# EAGLE board dashboard-pcb@aveon (EAGLE 9.6.2)
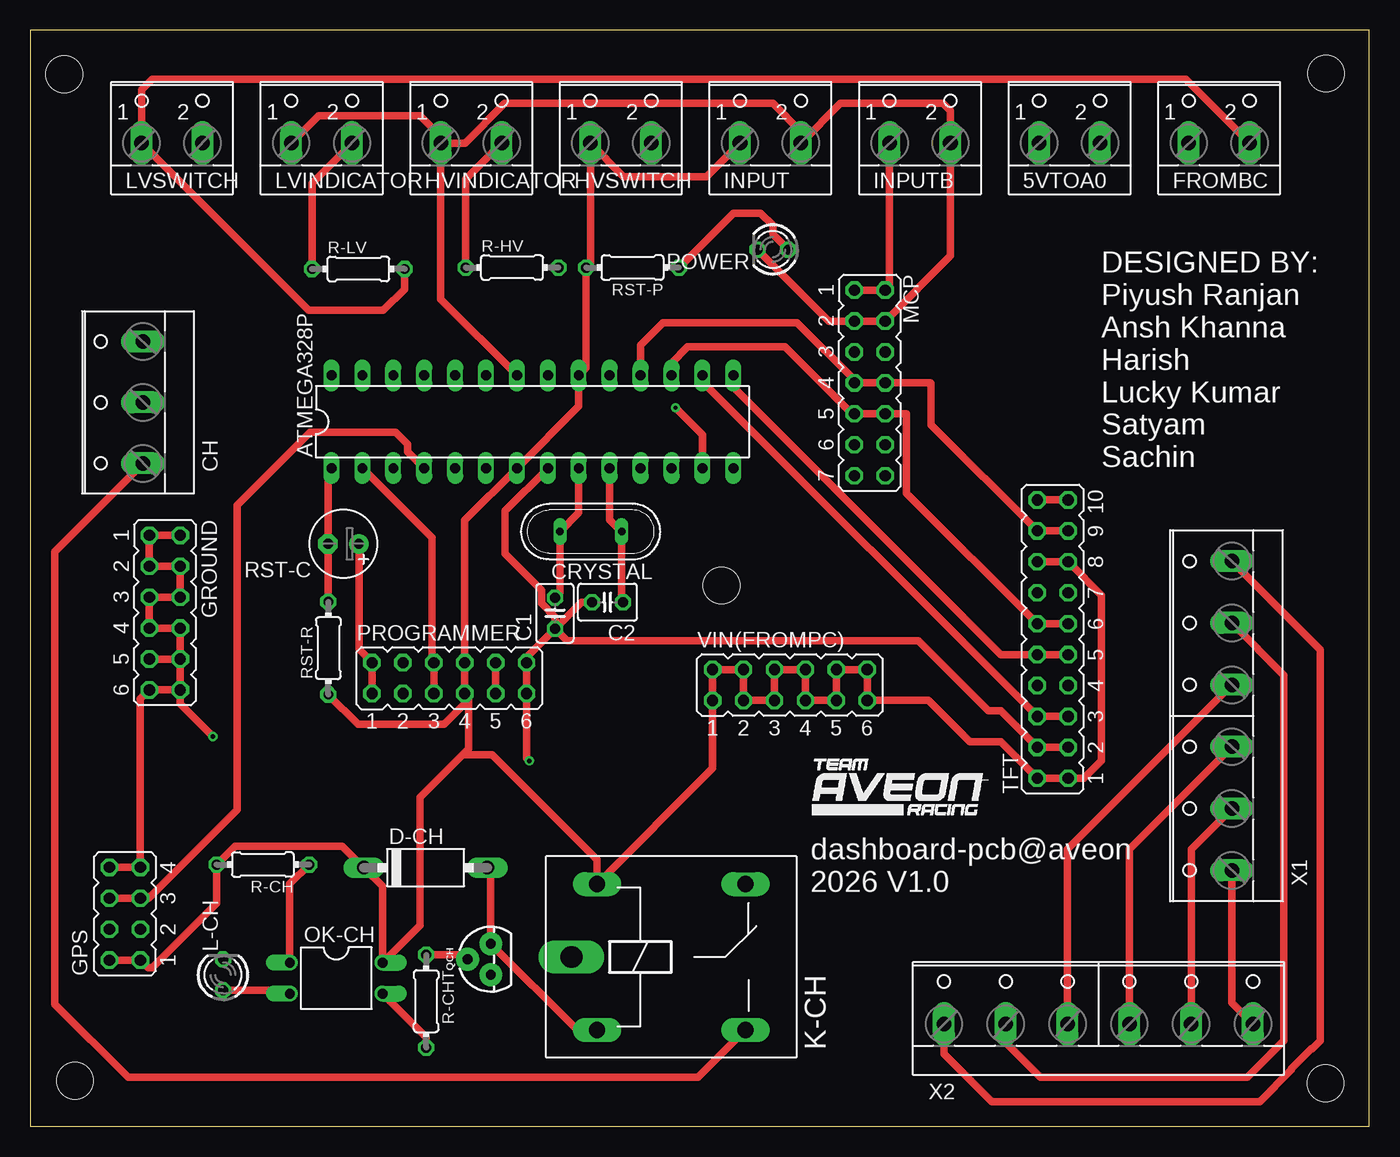
[diagram p0: board, top side]
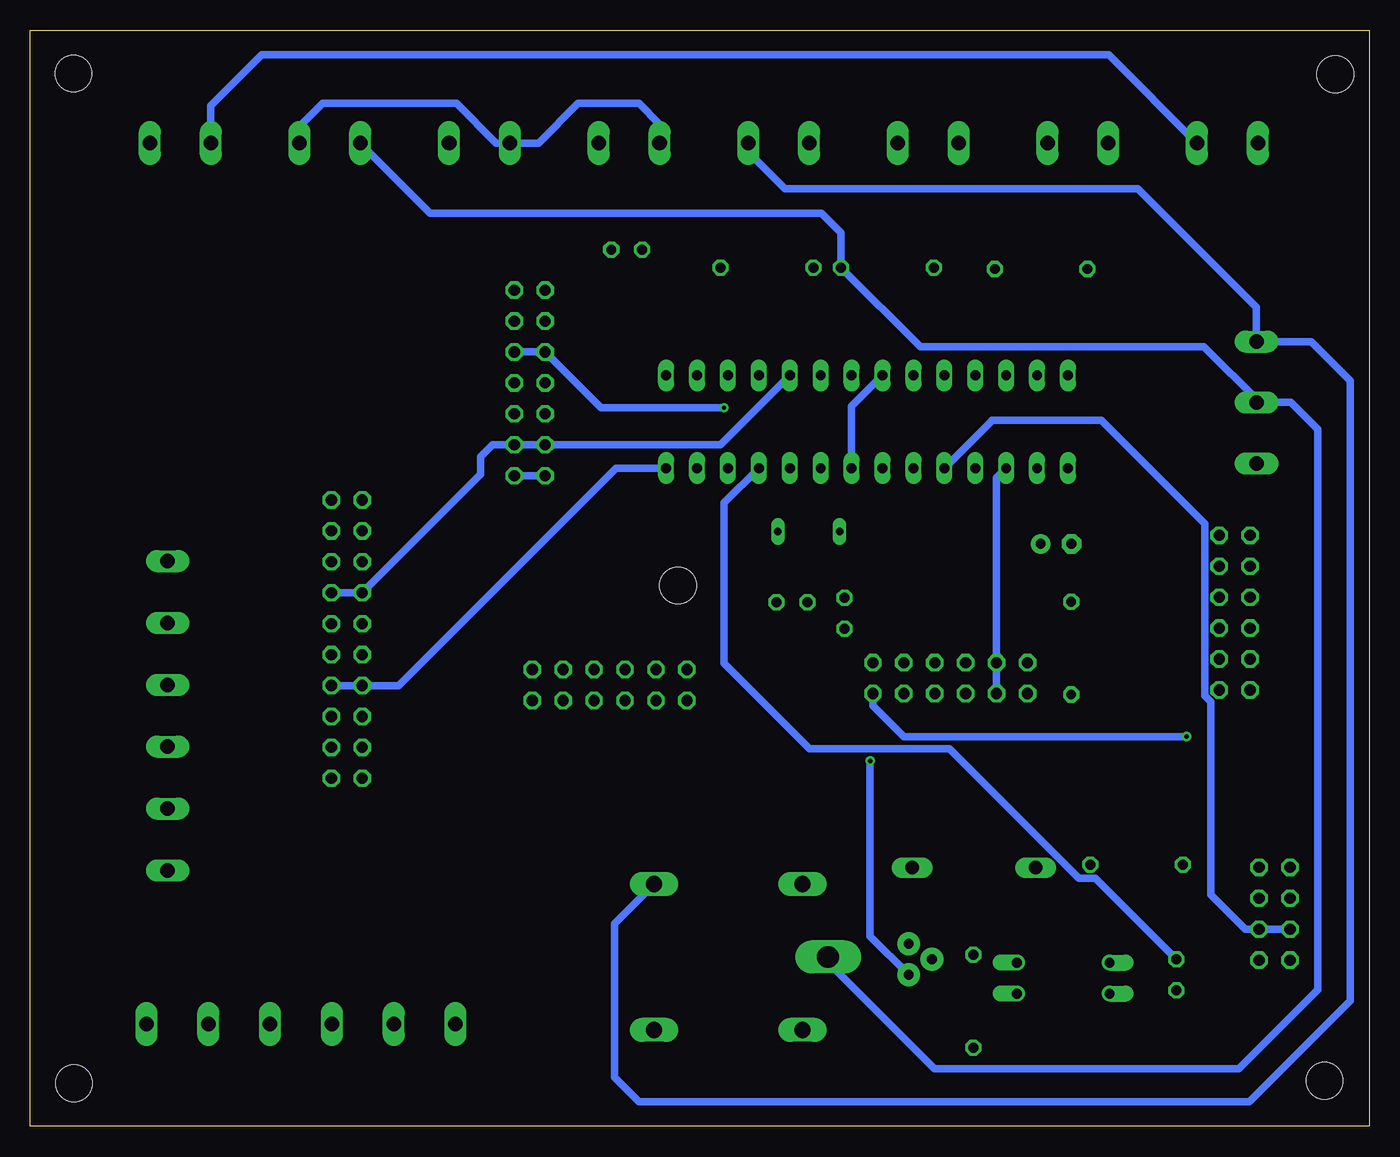
[diagram p1: board, bottom side, seen from below]

Size 110 x 90 mm. Coordinates in mm from the lower left corner, seen from the top.
Outline: 0,0 110,0 110,90 0,90 0,0
Copper layers (1*16): Top 0.035mm / dielectric 1.5mm / Bottom 0.035mm
Design rules "default": minimum track width 6mil, minimum drill 0.35mm, track to track 6mil, track to pad 6mil, pad to pad 6mil, via to via 6mil, smd to smd 6mil, copper to edge 40mil, drill to drill 6mil, minimum pad ring 10mil, minimum via ring 8mil, stop-mask expansion 4mil, vias tented up to drill 0mil, thermal gap 10mil
Holes 3 mm at 2.78,86.41 106.47,86.45 106.43,3.53 3.67,3.73 56.78,44.41

## Footprints (pad centres in the part's own frame; a part is rotated, then mirrored left to right if it is on the bottom)
W237-102 = drill 1.194 long: 1 -2.5,-1.27; 2 2.5,-1.27
DIL28-3 = drill 0.813 long: 1 -16.51,-3.81; 2 -13.97,-3.81; 3 -11.43,-3.81; 4 -8.89,-3.81; 5 -6.35,-3.81; 6 -3.81,-3.81; 7 -1.27,-3.81; 8 1.27,-3.81; 9 3.81,-3.81; 10 6.35,-3.81; 11 8.89,-3.81; 12 11.43,-3.81; 13 13.97,-3.81; 14 16.51,-3.81; 15 16.51,3.81; 16 13.97,3.81; 17 11.43,3.81; 18 8.89,3.81; 19 6.35,3.81; 20 3.81,3.81; 21 1.27,3.81; 22 -1.27,3.81; 23 -3.81,3.81; 24 -6.35,3.81; 25 -8.89,3.81; 26 -11.43,3.81; 27 -13.97,3.81; 28 -16.51,3.81
C025-030X050 = drill 0.813 octagon: 1 -1.27,0; 2 1.27,0
W237-103 = drill 1.194 long: 1 -5,-1.29; 2 0,-1.29; 3 5,-1.29
QS = drill 0.61 long: 1 -2.54,0; 2 2.54,0
P1-10 = drill 1.118 long: A 5.08,0; C -5.08,0
JP4Q = drill 0.914 octagon: 1 -3.81,-1.27; 2 -3.81,1.27; 3 -1.27,-1.27; 4 -1.27,1.27; 5 1.27,-1.27; 6 1.27,1.27; 7 3.81,-1.27; 8 3.81,1.27
JP6Q = drill 0.914 octagon: 1 -6.35,-1.27; 2 -6.35,1.27; 3 -3.81,-1.27; 4 -3.81,1.27; 5 -1.27,-1.27; 6 -1.27,1.27; 7 1.27,-1.27; 8 1.27,1.27; 9 3.81,-1.27; 10 3.81,1.27; 11 6.35,-1.27; 12 6.35,1.27
ZF112 = drill 1.321 long: 1 -6.096,5.994; 2 -6.096,-5.994; O 6.096,5.994; S 6.096,-5.994 | drill 1.803 long: P -8.204,0
LED3MM = drill 0.813 octagon: A -1.27,0; K 1.27,0
JP7Q = drill 0.914 octagon: 1 -7.62,-1.27; 2 -7.62,1.27; 3 -5.08,-1.27; 4 -5.08,1.27; 5 -2.54,-1.27; 6 -2.54,1.27; 7 0,-1.27; 8 0,1.27; 9 2.54,-1.27; 10 2.54,1.27; 11 5.08,-1.27; 12 5.08,1.27; 13 7.62,-1.27; 14 7.62,1.27
DIL04 = drill 0.813 offset: 1 -1.27,-3.81; 2 1.27,-3.81; 3 1.27,3.81; 4 -1.27,3.81
TO-92 = drill 0.813 pad 1.88: 1 -1.27,0; 2 0,1.905; 3 1.27,0
0204/7 = drill 0.813 octagon: 1 -3.81,0; 2 3.81,0
E2,5-6 = drill 0.813 pad 1.6: + -1.27,0 | drill 0.813 pad 1.6 octagon: - 1.27,0
JP10Q = drill 0.914 octagon: 1 -11.43,-1.27; 2 -11.43,1.27; 3 -8.89,-1.27; 4 -8.89,1.27; 5 -6.35,-1.27; 6 -6.35,1.27; 7 -3.81,-1.27; 8 -3.81,1.27; 9 -1.27,-1.27; 10 -1.27,1.27; 11 1.27,-1.27; 12 1.27,1.27; 13 3.81,-1.27; 14 3.81,1.27; 15 6.35,-1.27; 16 6.35,1.27; 17 8.89,-1.27; 18 8.89,1.27; 19 11.43,-1.27; 20 11.43,1.27
W237-6P = drill 1.194 long: 1 -12.7,-0.635; 2 -7.62,-0.635; 3 -2.54,-0.635; 4 2.54,-0.635; 5 7.62,-0.635; 6 12.7,-0.635

## Placement (x,y rotation side)
5VTOA0  [W237-102]  85.39,82.01 0 top
ATMEGA328P  [DIL28-3]  41.25,57.86 0 top
C1  [C025-030X050]  43.1,42.13 90 top
C2  [C025-030X050]  47.42,43.03 180 top
CH  CHARGING  [W237-103]  7.97,59.44 90 top
CRYSTAL  [QS]  46.05,48.83 180 top
D-CH  BA157  [P1-10]  32.47,21.23 0 top
FROMBC  [W237-102]  97.68,82.01 0 top
GPS  [JP4Q]  7.77,17.44 90 top
GROUND  [JP6Q]  11.05,42.17 270 top
HVINDICATOR  [W237-102]  36.22,82.01 0 top
HVSWITCH  [W237-102]  48.51,82.01 0 top
INPUT  [W237-102]  60.81,82.01 0 top
INPUTB  [W237-102]  73.1,82.01 0 top
K-CH  5V  [ZF112]  52.66,13.89 0 top
L-CH  Hijau  [LED3MM]  15.83,12.42 90 top
LVINDICATOR  [W237-102]  23.93,82.01 0 top
LVSWITCH  [W237-102]  11.63,82.01 0 top
MCP  [JP7Q]  68.97,61.05 270 top
OK-CH  PC817  [DIL04]  25.13,12.15 270 top
POWER  Hijau  [LED3MM]  61,72 180 top
PROGRAMMER  [JP6Q]  34.42,36.8 0 top
QCH  200mA/40V  [TO-92]  37.83,13.71 90 top
R-CH  [0204/7]  19.1,21.48 180 top
R-CHT  [0204/7]  32.52,10.26 270 top
R-HV  [0204/7]  39.58,70.52 0 top
R-LV  [0204/7]  26.95,70.4 0 top
RST-C  [E2,5-6]  25.72,47.83 180 top
RST-P  [0204/7]  49.48,70.52 180 top
RST-R  [0204/7]  24.48,39.26 90 top
TFT  [JP10Q]  84,40 90 top
VIN(FROMPC)  [JP6Q]  62.41,36.23 0 top
X1  [W237-6P]  98.09,33.71 90 top
X2  [W237-6P]  87.77,9.03 0 top

## Library data of the parts
5VTOA0 FROMBC HVINDICATOR HVSWITCH INPUT INPUTB LVINDICATOR LVSWITCH = con-wago-500; MPN: 237-102; OC_FARNELL: unknown; OC_NEWARK: 70K9898
ATMEGA328P = ic-package
C1 C2 RST-C = rcl; SPICEPREFIX: C
CH = con-wago-500; MPN: 237-103; OC_FARNELL: unknown; OC_NEWARK: 18M7116
CRYSTAL = special
D-CH = diode
GPS GROUND MCP PROGRAMMER TFT VIN(FROMPC) = jumper
K-CH = relay; OC_FARNELL: unknown; OC_NEWARK: unknown
L-CH POWER = led
OK-CH = optocoupler; MPN: PC817X4J000F; OC_FARNELL: 9707727; OC_NEWARK: 97K7059
QCH = SparkFun-DiscreteSemi; PROD_ID: TRANS-08447
R-CH R-CHT R-HV R-LV RST-P RST-R = rcl; SPICEPREFIX: R
X1 X2 = con-wago-508; OC_FARNELL: unknown; OC_NEWARK: unknown

## Nets
BACKUP-1: ATMEGA328P.12
BACKUP-2: ATMEGA328P.6
CH: ATMEGA328P.11 L-CH.K
CS7-CAN: ATMEGA328P.13 MCP.5 MCP.6
CS10-TFT: ATMEGA328P.16 TFT.5 TFT.6
DC9-TFT: ATMEGA328P.15 TFT.9 TFT.10
GND: ATMEGA328P.8 ATMEGA328P.22 C1.1 C2.2 GPS.7 GPS.8 GROUND.1 GROUND.2 GROUND.3 GROUND.4 GROUND.5 GROUND.6 GROUND.7 GROUND.8 GROUND.9 GROUND.10 GROUND.11 GROUND.12 HVINDICATOR.1 INPUT.2 INPUTB.2 LVINDICATOR.1 MCP.3 MCP.4 POWER.K PROGRAMMER.11 PROGRAMMER.12 QCH.1 TFT.3 TFT.4
INT: MCP.13 MCP.14
MISO: ATMEGA328P.18 MCP.7 MCP.8 TFT.17 TFT.18
MOSI: ATMEGA328P.17 MCP.9 MCP.10 TFT.11 TFT.12
N$1: POWER.A RST-P.1
N$5: FROMBC.1 LVSWITCH.2
N$6: FROMBC.2 LVSWITCH.1 R-LV.2
N$7: LVINDICATOR.2 R-LV.1
N$9: PROGRAMMER.1 PROGRAMMER.2 RST-C.+
N$13: ATMEGA328P.9 C1.2 CRYSTAL.2
N$14: X1.1 X2.6
N$16: ATMEGA328P.26
N$17: ATMEGA328P.25
N$18: X1.2 X2.5
N$19: X1.3 X2.4
N$20: ATMEGA328P.24
N$21: X1.4 X2.3
N$22: L-CH.A OK-CH.2
N$23: CH.3 HVSWITCH.2 K-CH.O
N$24: OK-CH.1 R-CH.1
N$25: OK-CH.3 R-CHT.2
N$26: D-CH.A K-CH.2 QCH.3
N$27: ATMEGA328P.23
N$28: QCH.2 R-CHT.1
N$29: CH.1 K-CH.S
N$30: 5VTOA0.1 CH.2 K-CH.P R-HV.2
N$31: X1.5 X2.2
N$32: HVINDICATOR.2 R-HV.1
N$33: X1.6 X2.1
N$42: TFT.19 TFT.20
N$62: ATMEGA328P.10 C2.1 CRYSTAL.1
N$66: PROGRAMMER.9 PROGRAMMER.10
N$87: ATMEGA328P.28
N$88: ATMEGA328P.27
RST: ATMEGA328P.1 RST-C.- RST-R.2
RST8-TFT: ATMEGA328P.14 TFT.7 TFT.8
RX: ATMEGA328P.2 PROGRAMMER.5 PROGRAMMER.6
RX3-GPS: ATMEGA328P.5 GPS.3 GPS.4
SCK: ATMEGA328P.19 MCP.11 MCP.12 TFT.13 TFT.14
TX: ATMEGA328P.3 PROGRAMMER.3 PROGRAMMER.4
TX2-GPS: ATMEGA328P.4 GPS.5 GPS.6
VIN(FROMPCB): 5VTOA0.2 ATMEGA328P.7 ATMEGA328P.20 D-CH.C GPS.1 GPS.2 HVSWITCH.1 INPUT.1 INPUTB.1 K-CH.1 MCP.1 MCP.2 OK-CH.4 PROGRAMMER.7 PROGRAMMER.8 R-CH.2 RST-P.2 RST-R.1 TFT.1 TFT.2 TFT.15 TFT.16 VIN(FROMPC).1 VIN(FROMPC).2 VIN(FROMPC).3 VIN(FROMPC).4 VIN(FROMPC).5 VIN(FROMPC).6 VIN(FROMPC).7 VIN(FROMPC).8 VIN(FROMPC).9 VIN(FROMPC).10 VIN(FROMPC).11 VIN(FROMPC).12

## Tracks (layer width: path | path; a pad name or v marks a point on that pad's centre or on a via)
CH
  Bottom 0.61: L-CH.K 22.5,20.36 23.83,20.36 34.47,31 46,31 53,38 53,51.19 ATMEGA328P.11
CS7-CAN  (via drill 0.35)
  Top 0.61: ATMEGA328P.13 55.22,56.78 v53,59
  Bottom 0.61: v53,59 63.11,59 MCP.5 MCP.6
CS10-TFT
  Top 0.61: ATMEGA328P.16 55.22,61.16 TFT.6 TFT.5
DC9-TFT
  Top 0.61: TFT.9 TFT.10 79.73,38.73 57.76,60.7 ATMEGA328P.15
GND  (via drill 0.35)
  Top 0.61: C1.1 45.28,43.03 C2.2 | C1.1 40.77,38.53 PROGRAMMER.12 PROGRAMMER.11 40.77,30.23 v41,30 | C1.1 43.1,41.82 41.98,42.93 41.98,44.02 39,47 39,50.53 ATMEGA328P.8 | GPS.8 GPS.7 9.04,35.09 GROUND.11 GROUND.12 | v15,32 12.32,34.68 GROUND.12 | GROUND.9 GROUND.10 | GROUND.10 GROUND.12 | GROUND.10 GROUND.8 GROUND.7 GROUND.5 GROUND.6 GROUND.4 GROUND.3 GROUND.1 GROUND.2 | C1.1 44.1,39.86 72.98,39.86 78.73,34.11 79.73,34.11 TFT.4 TFT.3 | LVINDICATOR.1 23.68,83 32,83 33.72,81.28 HVINDICATOR.1 | HVINDICATOR.1 35.72,80.74 38.98,84 61,84 63.3,81.69 INPUT.2 66.56,84 75,84 75.6,83.4 INPUTB.2 75.6,71.49 MCP.4 MCP.3 65.6,66.13 POWER.K | HVINDICATOR.1 33.72,67.93 ATMEGA328P.22
  Bottom 0.61: QCH.1 41,15.61 v41,30 | PROGRAMMER.11 40.77,34.53 38.24,32 v15,32 | ATMEGA328P.8 42.52,59.13 ATMEGA328P.22
INT
  Bottom 0.61: MCP.13 MCP.14
MISO
  Top 0.61: ATMEGA328P.18 50.14,64.14 52,66 63,66 67.7,61.3 MCP.7 MCP.8 73.95,61.05 74,61 74,57.62 TFT.18 TFT.17
MOSI
  Top 0.61: ATMEGA328P.17 52.68,62.68 54,64 62,64 67.49,58.51 MCP.9 MCP.10 72,58.51 72,52 TFT.12 TFT.11
N$1
  Top 0.61: POWER.A 61,73.27 61,74 60,75 57.77,75 RST-P.1
N$5
  Bottom 0.61: LVSWITCH.2 21.39,88 91,88 95.18,83.82 FROMBC.1
N$6
  Top 0.61: FROMBC.2 94.93,86 10,86 9.13,85.13 LVSWITCH.1 22.88,67 29,67 30.76,68.76 R-LV.2
N$7
  Top 0.61: R-LV.1 23.14,77.46 LVINDICATOR.2
N$9
  Top 0.61: RST-C.+ 26.99,39.15 PROGRAMMER.2 PROGRAMMER.1
N$13
  Top 0.61: ATMEGA328P.9 45.06,50.38 CRYSTAL.2 43.51,43.81 C1.2
N$14
  Top 0.61: X1.1 98.72,10.14 X2.6
N$18
  Top 0.61: X1.2 95.39,22.75 X2.5
N$19
  Top 0.61: X1.3 90.31,22.75 X2.4
N$21
  Top 0.61: X1.4 85.22,22.75 X2.3
N$22
  Top 0.61: L-CH.A 21.05,11.15 OK-CH.2
N$23
  Bottom 0.61: K-CH.O 62,16.64 62,4 60,2 9.85,2 1.55,10.3 1.55,61.23 4.76,64.44 CH.3 9.26,67.25 19,77 48,77 51.01,80.01 HVSWITCH.2
N$24
  Top 0.61: OK-CH.1 21.32,19.89 R-CH.1
N$25
  Top 0.61: OK-CH.3 32.52,7.3 R-CHT.2
N$26
  Top 0.61: D-CH.A 37.83,20.95 QCH.3 44.91,7.9 K-CH.2
N$28
  Top 0.61: QCH.2 35.56,14.07 R-CHT.1
N$29
  Top 0.61: K-CH.S 54.86,4 8.03,4 2,10.03 2,47.19 CH.1
N$30
  Bottom 0.61: K-CH.P 44.46,13.46 35.72,4.72 10.7,4.72 4.23,11.19 4.23,57.23 6.44,59.44 9,59.44 | 9,59.44 CH.2 | 5VTOA0.1 77.15,75 45,75 43.39,73.39 R-HV.2 36.87,64 13.56,64 9,59.44
N$31
  Top 0.61: X1.5 103,37.05 103,7 100,4 83,4 80.14,6.86 X2.2
N$32
  Top 0.61: HVINDICATOR.2 35.77,77.79 R-HV.1
N$33
  Top 0.61: X1.6 106,39.13 106,7 105.35,6.35 105.26,6.35 103.61,4.7 103.61,4.61 101,2 79,2 75.06,5.93 X2.1
N$42
  Top 0.61: TFT.20 TFT.19
N$62
  Top 0.61: ATMEGA328P.10 47.6,49.82 CRYSTAL.1 48.59,43.13 C2.1
N$66
  Top 0.61: PROGRAMMER.10 PROGRAMMER.9
RST
  Top 0.61: RST-R.2 24.45,43.1 RST-C.- 24.45,53.76 ATMEGA328P.1
RST8-TFT
  Bottom 0.61: TFT.7 TFT.8 79.73,36.19 61.87,54.05 ATMEGA328P.14
RX
  Top 0.61: PROGRAMMER.5 PROGRAMMER.6 33,38.22 33,48.33 ATMEGA328P.2
RX3-GPS
  Bottom 0.61: ATMEGA328P.5 31,57.95 31,58 22,58 13.49,49.49 13.49,35.34 13,34.85 13,19 10.17,16.17 GPS.3 GPS.4
SCK
  Bottom 0.61: ATMEGA328P.19 53.3,55.97 MCP.11 MCP.12 72.03,55.97 73,55 73,53.54 TFT.14 TFT.13
TX
  Bottom 0.61: ATMEGA328P.3 30.61,53.26 PROGRAMMER.4 PROGRAMMER.3
TX2-GPS
  Top 0.61: ATMEGA328P.4 31,55.41 31,56 30,57 23,57 17,51 17,26 9.71,18.71 GPS.5 GPS.6
VIN(FROMPCB)
  Top 0.61: PROGRAMMER.7 PROGRAMMER.8 35.69,49.76 ATMEGA328P.7 45.06,59.13 ATMEGA328P.20 45.67,62.28 RST-P.2 46.01,70.86 HVSWITCH.1 48.76,78 55.56,78 INPUT.1 | RST-R.1 26.93,33 34,33 35.69,34.69 PROGRAMMER.7 | 35.5,30.5 32,27 32,16.48 OK-CH.4 28.94,19.68 D-CH.C 25.62,23 16.81,23 R-CH.2 15.29,18.29 10,13 9.67,13 GPS.1 GPS.2 | 35.5,30.5 36,31 36,35.22 PROGRAMMER.7 | 35.5,30.5 37.95,30.5 46.56,21.88 K-CH.1 56.06,29.38 VIN(FROMPC).1 VIN(FROMPC).2 VIN(FROMPC).4 VIN(FROMPC).3 VIN(FROMPC).5 VIN(FROMPC).6 VIN(FROMPC).8 VIN(FROMPC).7 VIN(FROMPC).9 VIN(FROMPC).10 VIN(FROMPC).12 VIN(FROMPC).11 73.8,34.96 77.19,31.57 79.73,31.57 TFT.2 TFT.1 86.57,28.57 88,30 88,43.62 TFT.15 TFT.16 | INPUTB.1 70.6,69.03 MCP.2 MCP.1
  Bottom 0.61: 5VTOA0.2 87.89,82.11 86,84 75,84 71.74,80.74 INPUTB.1 68.26,80.74 65,84 60,84 58.3,82.31 INPUT.1

## Text on the board
tPlace: DESIGNED BY: / Piyush Ranjan / Ansh Khanna / Harish / Lucky Kumar / Satyam / Sachin | dashboard-pcb@aveon / 2026 V1.0